# EAGLE board Board-Schematic (EAGLE 7.1.0)

Size 35.54 x 65.71 mm. Coordinates in mm from the lower left corner, seen from the top.
Outline: 0,0 35.54,0 35.54,65.71 0,65.71 0,0
Copper layers (1*16): Top 0.035mm / dielectric 1.5mm / Bottom 0.035mm
Design rules "default": minimum track width 10mil, minimum drill 24mil, track to track 8mil, track to pad 8mil, pad to pad 8mil, via to via 8mil, smd to smd 8mil, copper to edge 40mil, drill to drill 8mil, minimum pad ring 10mil, minimum via ring 8mil, stop-mask expansion 4mil, vias tented up to drill 0mil, thermal gap 10mil

## Footprints (pad centres in the part's own frame; a part is rotated, then mirrored left to right if it is on the bottom)
DIL16 = drill 0.813 long: 1 -8.89,-3.81; 2 -6.35,-3.81; 3 -3.81,-3.81; 4 -1.27,-3.81; 5 1.27,-3.81; 6 3.81,-3.81; 7 6.35,-3.81; 8 8.89,-3.81; 9 8.89,3.81; 10 6.35,3.81; 11 3.81,3.81; 12 1.27,3.81; 13 -1.27,3.81; 14 -3.81,3.81; 15 -6.35,3.81; 16 -8.89,3.81
LED5MM = drill 0.813 octagon: A -1.27,0; K 1.27,0
0204/7 = drill 0.813 octagon: 1 -3.81,0; 2 3.81,0
FE06 = drill 0.813 long: 1 -6.35,0; 2 -3.81,0; 3 -1.27,0; 4 1.27,0; 5 3.81,0; 6 6.35,0

## Placement (x,y rotation side)
IC1  74HC595N  [DIL16]  7.62,11.43 270 top
LED2  [LED5MM]  16.51,57.15 0 top
LED3  [LED5MM]  16.51,45.72 0 top
LED4  [LED5MM]  16.51,34.29 0 top
LED5  [LED5MM]  16.51,20.32 0 top
LED6  [LED5MM]  16.51,7.62 0 top
R1  [0204/7]  6.35,44.45 180 top
R2  [0204/7]  6.35,48.26 180 top
R3  [0204/7]  6.35,52.07 180 top
R4  [0204/7]  6.35,55.88 180 top
R5  [0204/7]  6.35,59.69 180 top
SV1  [FE06]  5.08,31.75 90 top
SV2  [FE06]  30.48,31.75 90 top

## Library data of the parts
IC1 = 74xx-eu
LED2-LED6 = led
R1-R5 = resistor
SV1 SV2 = con-lsta; OC_FARNELL: unknown; OC_NEWARK: unknown

## Nets
A: IC1.15 LED2.A
B: IC1.1 LED3.A
C: IC1.2 LED4.A
CLK: IC1.11 SV1.3 SV2.3
D: IC1.3 LED5.A
DATA-IN: IC1.14 SV1.2
DATA-OUT: IC1.9 SV2.2
E: IC1.4 LED6.A
GND: IC1.8 IC1.13 R1.2 R5.2 SV1.6 SV2.6
LATCH: IC1.12 SV1.4 SV2.4
N$1: LED2.K R1.1
N$2: LED3.K R2.1
N$3: LED4.K R3.1
N$4: LED5.K R4.1
N$5: LED6.K R5.1
RESET: IC1.10 SV1.5 SV2.5
VCC: IC1.16 SV1.1 SV2.1

## Tracks (layer width: path | path; a pad name or v marks a point on that pad's centre or on a via)
A  (1 unrouted)
B  (1 unrouted)
C  (1 unrouted)
CLK  (2 unrouted)
D  (1 unrouted)
DATA-IN  (1 unrouted)
DATA-OUT  (1 unrouted)
E  (1 unrouted)
GND  (5 unrouted)
LATCH  (2 unrouted)
N$1  (1 unrouted)
N$2  (1 unrouted)
N$3  (1 unrouted)
N$4  (1 unrouted)
N$5  (1 unrouted)
RESET  (2 unrouted)
VCC  (2 unrouted)